# EAGLE board Desain Hardware Fahmi Mashuri (EAGLE 9.6.2)
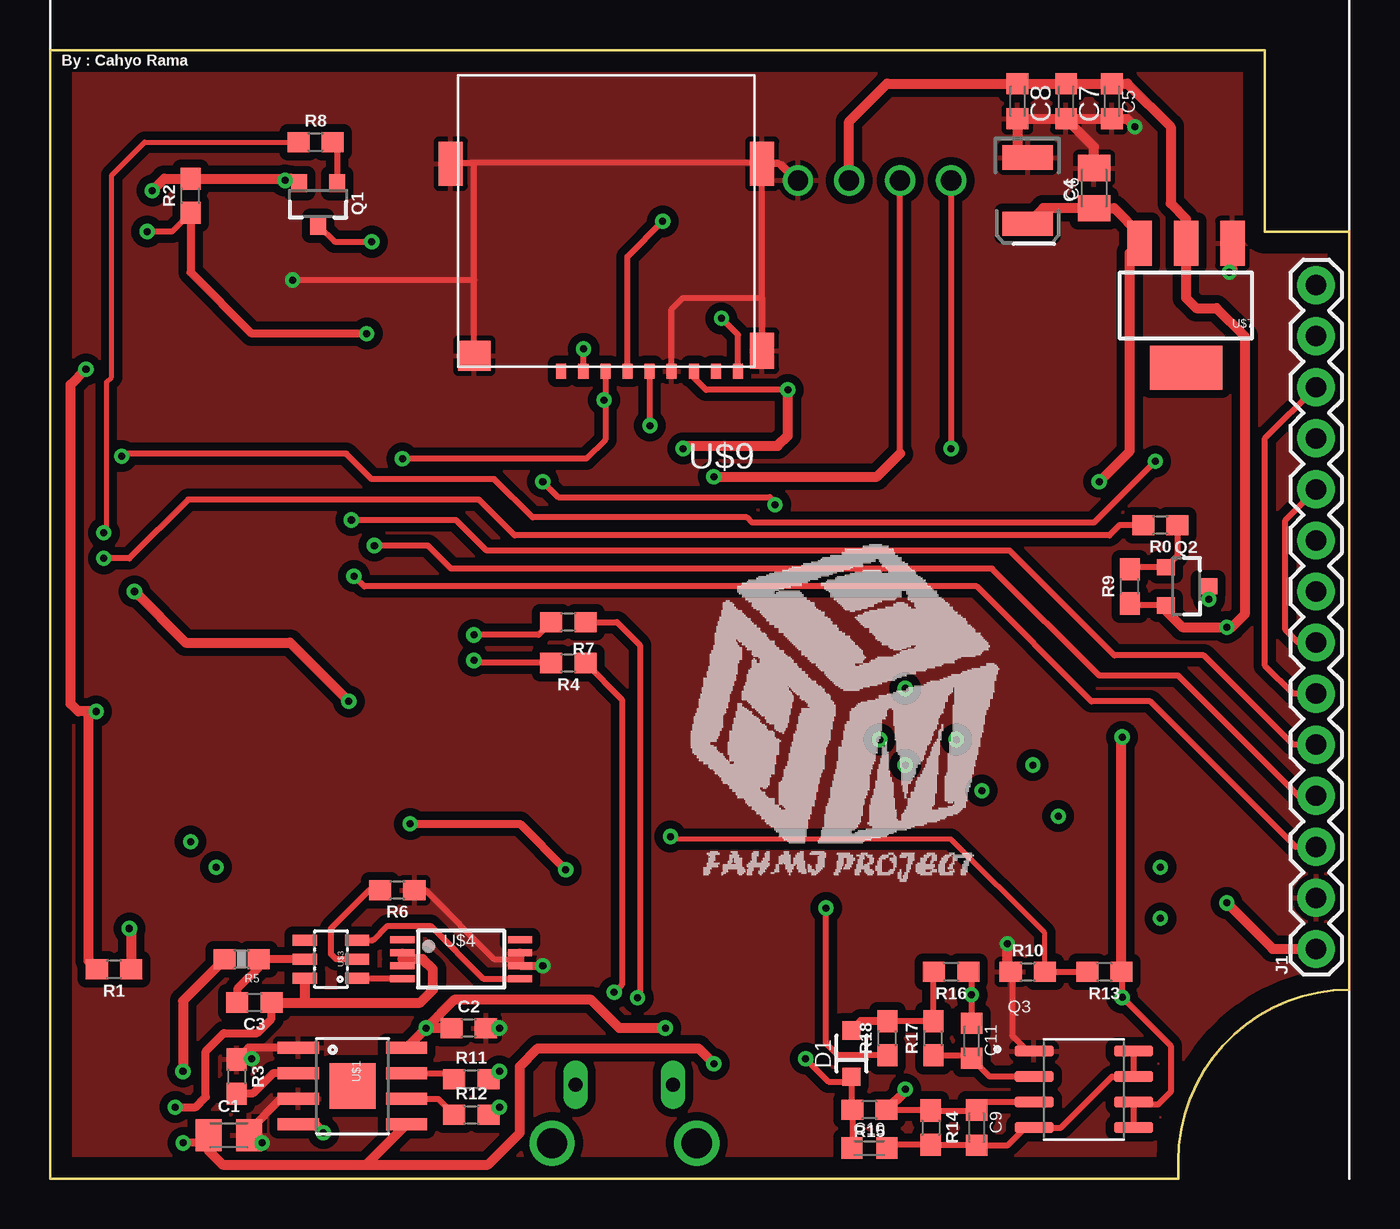
[diagram p0: board, top side]
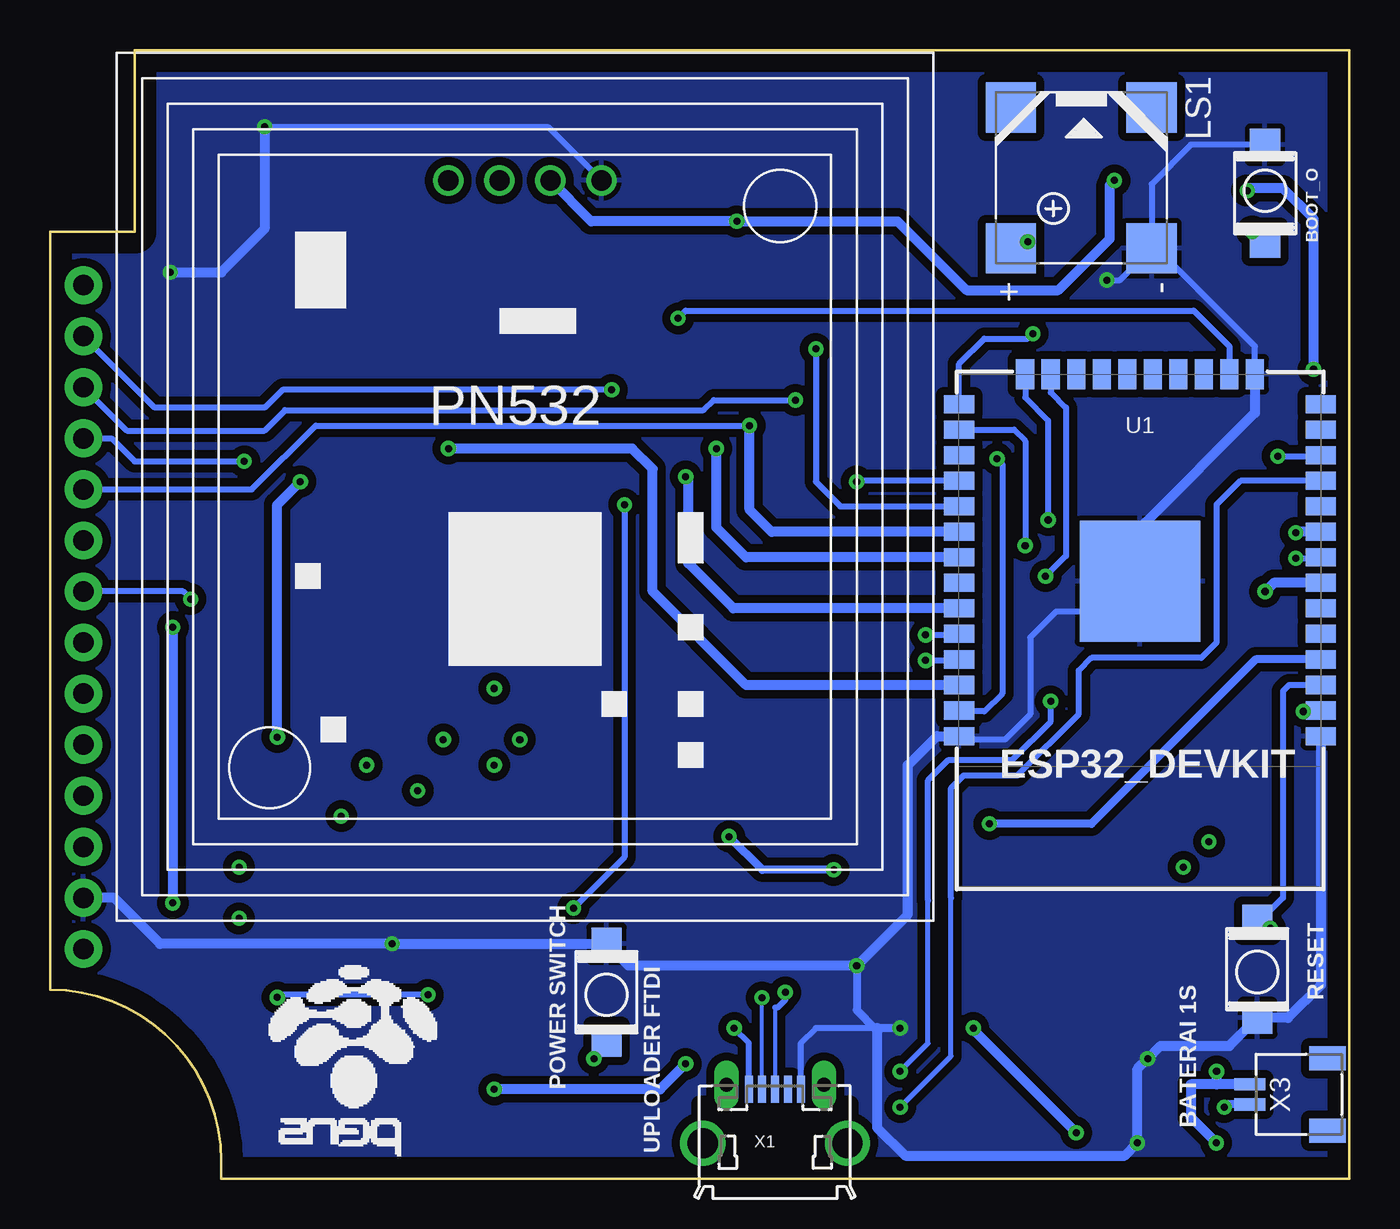
[diagram p1: board, bottom side, seen from below]

Size 64.64 x 56.13 mm. Coordinates in mm from the lower left corner, seen from the top.
Outline: 0,0 56.13,0 56.13,0.89 arc-90 64.64,9.4 64.64,47.12 60.45,47.12 60.45,56.13 0,56.13 0,0
Copper layers (1*16): Top 0.035mm / dielectric 1.5mm / Bottom 0.035mm
Design rules "default": minimum track width 6mil, minimum drill 0.35mm, track to track 6mil, track to pad 6mil, pad to pad 6mil, via to via 6mil, smd to smd 6mil, copper to edge 40mil, drill to drill 6mil, minimum pad ring 10mil, minimum via ring 8mil, stop-mask expansion 4mil, vias tented up to drill 0mil, thermal gap 10mil

## Footprints (pad centres in the part's own frame; a part is rotated, then mirrored left to right if it is on the bottom)
C0805K = smd 1.3 x 1.6: 1 -1,0; 2 1,0
0603 = smd 1.1 x 1: 1 -0.85,0; 2 0.85,0
EIA3528 = smd 1.2 x 2.5: A 1.65,0; C -1.65,0
C0603K = smd 1.05 x 1.08: 1 -0.875,0; 2 0.875,0
SOD-323 = smd 0.9 x 0.9: A 1.15,0; C -1.15,0
1X14 = drill 1.016 pad 1.88: 1 0,0; 2 2.54,0; 3 5.08,0; 4 7.62,0; 5 10.16,0; 6 12.7,0; 7 15.24,0; 8 17.78,0; 9 20.32,0; 10 22.86,0; 11 25.4,0; 12 27.94,0; 13 30.48,0; 14 33.02,0
CUI_CMT-8530S-SMT = smd 2.5 x 2.5: 1 -3.5,3.5; 2 -3.5,-3.5; N 3.5,3.5; P 3.5,-3.5
SOT23-3 = smd 0.8 x 0.9: 1 -0.95,-1; 2 0.95,-1; 3 0,1.1
SOIC127P600X175-8N = smd 1.97 x 0.57: 1 -2.475,1.905; 2 -2.475,0.635; 3 -2.475,-0.635; 4 -2.475,-1.905; 5 2.475,-1.905; 6 2.475,-0.635; 7 2.475,0.635; 8 2.475,1.905
0603-RES = smd 1.1 x 1: 1 -0.85,0; 2 0.85,0
ESP-WROOM-32 = smd 0.9 x 1.5: 1 7.7,9; 2 6.43,9; 3 5.16,9; 4 3.89,9; 5 2.62,9; 6 1.35,9; 7 0.08,9; 8 -1.19,9; 9 -2.46,9; 10 -3.73,9; 11 -5,9; 12 -6.27,9; 13 -7.54,9; 14 -8.81,9; 25 -8.81,-9; 26 -7.54,-9; 27 -6.27,-9; 28 -5,-9; 29 -3.73,-9; 30 -2.46,-9; 31 -1.19,-9; 32 0.08,-9; 33 1.35,-9; 34 2.62,-9; 35 3.89,-9; 36 5.16,-9; 37 6.43,-9; 38 7.7,-9 | smd 1.5 x 0.9: 15 -10.3,5.715; 16 -10.3,4.445; 17 -10.3,3.175; 18 -10.3,1.905; 19 -10.3,0.635; 20 -10.3,-0.635; 21 -10.3,-1.905; 22 -10.3,-3.175; 23 -10.3,-4.445; 24 -10.3,-5.715 | smd 6 x 6: GND 0,0
SOIC-8 = smd 0.61 x 2.057: 1 -2.07,-2.892; 2 -0.8,-2.892; 3 0.47,-2.892; 4 1.74,-2.892; 5 1.74,2.492; 6 0.47,2.492; 7 -0.8,2.492; 8 -2.07,2.492 | smd 2.286 x 2.286: EPAD -0.165,-0.2
PN532_NFC = drill 1: GND 16.51,6.35; SCL 24.13,6.35; SDA 21.59,6.35; VCC 19.05,6.35
SOT23-6L = smd 0.55 x 1.2: 1 -0.95,-1.3; 2 0,-1.3; 3 0.95,-1.3; 4 0.95,1.3; 5 0,1.3; 6 -0.95,1.3
TSSOP8 = smd 1.2 x 0.35: 1 -2.925,0.975; 2 -2.925,0.325; 3 -2.925,-0.325; 4 -2.925,-0.975; 5 2.925,-0.975; 6 2.925,-0.325; 7 2.925,0.325; 8 2.925,0.975
PUSHBUTTOMICRO = smd 1.6 x 1.5: 1 -0.381,1.524; 2 4.445,1.524
SOT223 = smd 1.219 x 2.235: 1 -2.311,-3.099; 2 0,-3.099; 3 2.311,-3.099 | smd 3.6 x 2.2: 4 0,3.099
MICROSD-PUSH-OUT = smd 0.5 x 0.75: 1 9.625,0.225; 2 8.525,0.225; 3 7.425,0.225; 4 6.325,0.225; 5 5.225,0.225; 6 4.125,0.225; 7 3.025,0.225; 8 1.925,0.225; CD 0.825,0.225 | smd 1.2 x 1.8: G1 -0.375,-0.8 | smd 1.2 x 2.2: G2 -0.375,-10.1; G4 15.125,-10.1 | smd 1.6 x 1.5: G3 13.95,-0.55
ZX62D-B-5PA8 = smd 1.35 x 0.4: 1 4.825,1.3; 2 4.825,0.65; 3 4.825,0; 4 4.825,-0.65; 5 4.825,-1.3 | drill 1.5: S1 2.15,-3.6; S2 2.15,3.6 | drill 0.7 long: S3 5.05,2.425; S4 5.05,-2.425
SM02B-SRSS-TB = smd 0.6 x 1.55: 1 0.5,0; 2 -0.5,0 | smd 1.2 x 1.8: M1 1.8,3.875; M2 -1.8,3.875

## Placement (x,y rotation side)
C1  10uF  [C0805K]  8.89,2.16 0 top
C2  1.0uF  [0603]  20.83,7.49 0 top
C3  0.1uF  [0603]  10.16,8.76 180 top
C4  2.2uF  [EIA3528]  48.64,49.15 270 top
C5  100nf  [C0603K]  52.83,53.59 270 top
C6  1uf  [C0805K]  51.94,49.28 90 top
C7  100nf  [C0603K]  50.55,53.59 270 top
C8  100nf  [C0603K]  48.13,53.59 270 top
C9  100nf  [C0603K]  46.1,2.54 270 top
C10  1uF  [C0603K]  40.77,1.52 0 top
C11  10uF  [C0603K]  45.85,6.86 270 top
D1  [SOD-323]  39.88,6.22 90 top
FRAME1  FRAME-LETTER  [CREATIVE_COMMONS]  5.71,-8.64 0 top  (outside the outline)
J1  [1X14]  62.99,11.43 90 top
LS1  CMT-8530S-SMT  [CUI_CMT-8530S-SMT]  13.33,49.78 270 bottom
Q1  2TY  [SOT23-3]  13.33,48.51 180 top
Q2  2TY  [SOT23-3]  56.52,29.46 270 top
Q3  IRF7319  [SOIC127P600X175-8N]  51.43,4.44 0 top
R0  1k  [0603]  55.24,32.51 180 top
R1  10k  [0603]  3.18,10.41 180 top
R2  10k  [0603]  6.99,48.89 90 top
R3  1.2k  [0603]  9.27,5.08 270 top
R4  100  [0603]  25.78,25.65 180 top
R5  100  [0603-RES]  9.52,10.92 180 top
R6  1k  [0603]  17.27,14.35 180 top
R7  100  [0603]  25.78,27.69 180 top
R8  100  [0603]  13.21,51.56 0 top
R9  10K  [0603]  53.72,29.46 90 top
R10  1.2k  [0603]  48.64,10.29 0 top
R11  100  [0603]  20.96,4.95 0 top
R12  100  [0603]  20.96,3.17 0 top
R13  330  [0603]  52.45,10.29 180 top
R14  100k  [0603]  43.81,2.54 270 top
R15  10K  [0603]  40.77,3.43 180 top
R16  100k  [0603]  44.83,10.29 180 top
R17  300k  [0603]  43.94,6.98 90 top
R18  1k  [0603]  41.66,6.98 90 top
U1  ESP-WROOM-32  [ESP-WROOM-32]  10.41,29.72 270 bottom
U$1  DIO5158  [SOIC-8]  15.24,4.44 270 top
U$2  PN532_NFC  [PN532_NFC]  20.7,56.01 180 bottom
U$3  DW01-P  [SOT23-6L]  13.97,10.92 90 top
U$4  FS8205A  [TSSOP8]  20.45,10.92 0 top
U$5  PUSHBUTTOMICRO  [PUSHBUTTOMICRO]  3.05,8.38 90 bottom
U$6  PUSHBUTTOMICRO  [PUSHBUTTOMICRO]  5.71,51.05 270 bottom
U$7  AMS1117  [SOT223]  56.52,43.43 180 top
U$8  PUSHBUTTOMICRO  [PUSHBUTTOMICRO]  35.43,7.24 90 bottom
U$9  MICROSD-PUSH-OUT  [MICROSD-PUSH-OUT]  35.05,40.39 180 top
X1  ZX62D-B-5PA8  [ZX62D-B-5PA8]  28.57,-0.38 90 bottom
X3  SM02B-SRSS-TB  [SM02B-SRSS-TB]  4.95,4.19 270 bottom

## Library data of the parts
C1 C5-C11 = rcl; SPICEPREFIX: C
C2 = SparkFun-Capacitors; PROD_ID: CAP-00868
C3 = SparkFun-Capacitors; PROD_ID: CAP-08604
C4 = SparkFun-Capacitors; PROD_ID: CAP-10790
D1 = bt_diode
FRAME1 = SparkFun-Aesthetics
J1 = SparkFun-Connectors
LS1 = Buzzer_SMD; AVAILABILITY: Good; CUI_PURCHASE_URL: https://www.cuidevices.com/product/audio/buzzers/audio-transducers/cmt-8530s-smt-tr?utm_source=snapeda.com&utm_medium=referral&utm_campaign=snapedaBOM; DESCRIPTION: 8.5 mm, 3.6 Vo-p, 90 dB, Surface Mount (SMT), Magnetic Audio Transducer Buzzer; MF: CUI Devices; MP: CMT-8530S-SMT-TR; PACKAGE: CUI; PRICE: None; PURCHASE-URL: https://pricing.snapeda.com/search/part/CMT-8530S-SMT-TR/?ref=eda
Q1 Q2 = SparkFun-DiscreteSemi; PROD_ID: TRANS-08052
Q3 = IRF7319; AVAILABILITY: Unavailable; DESCRIPTION: Mosfet Array N and P-Channel 30V 2W Surface Mount 8-SO; MF: Infineon Technologies; MP: IRF7319; PACKAGE: SOIC-8 International Rectifier; PRICE: None
R0 R1 R2 R4 R7-R9 R11 R12 R14-R18 = SparkFun-Resistors; PROD_ID: RES-10055
R3 R10 R13 = SparkFun-Resistors; PROD_ID: RES-09568
R5 U$4 = SparkFun
R6 = SparkFun-Resistors; PROD_ID: RES-07856
U1 = SparkFun-RF; PROD_ID: IC-13849
U$1 = ERADIONICA
U$2 = PN532
U$3 = lipo
U$5 U$6 U$8 = PUSHBUTTOMICRO
U$7 = SparkFun-IC-Power; PROD_ID: VREG-13917
U$9 = microsd
X1 = zx62d-b-5pa8-oshpark_10; MF: Hirose; MPN: ZX62D-B-5PA8; OC_FARNELL: 2300438; OC_NEWARK: 69W0712
X3 = con-JST SH

## Nets
3.3V: C5.1 C7.1 C8.1 J1.1 Q1.2 Q2.2 R1.2 R2.2 R9.1 U1.2 U$2.VCC U$7.2 U$9.4
BAT: C1.1 C9.1 Q3.3 R5.2 R14.1 R15.1 U$1.5 X3.2
EN: R1.1 U1.3 U$5.2
GND: C1.2 C2.2 C4.C C5.2 C6.2 C7.2 C8.2 J1.2 LS1.N Q3.1 R3.1 R6.1 R10.1 U1.1 U1.15 U1.38 U1.GND U$1.1 U$1.3 U$2.GND U$4.6 U$4.7 U$5.1 U$6.1 U$7.1 U$8.2 U$9.6 U$9.G1 U$9.G2 U$9.G3 U$9.G4 X1.5
GND-ISO: C3.1 U$3.6 U$4.2 U$4.3 X3.1
IO0: R2.1 U1.25 U$6.2
IO_2: J1.5 U1.24
IO_4: J1.4 U1.26
IO_5: U1.29 U$9.2
IO_15: J1.3 U1.23
IO_16: U1.16 U$9.CD
IO_17: R18.1 U1.28
IO_18: J1.7 J1.10 U1.30 U$9.5
IO_19: J1.13 U1.31 U$9.7
IO_21: U1.33 U$2.SDA
IO_22: U1.36 U$2.SCL
IO_23: J1.6 J1.12 U1.37 U$9.3
IO_26: R12.2 U1.11
IO_27: J1.11 U1.12
IO_32: R0.2 U1.8
IO_33: R8.1 U1.9
IO_35: R11.2 U1.7
IO_36: R10.2 R13.2 U1.4
LED_D: J1.8 Q2.3
N$1: R6.2 U$3.2
N$2: U$3.3 U$4.5
N$3: R3.2 U$1.2
N$4: U$3.1 U$4.4
N$5: R4.1 X1.3
N$6: R7.1 X1.2
N$7: LS1.P Q1.3
N$8: Q1.1 R8.2
N$9: Q2.1 R0.1 R9.2
N$10: R11.1 U$1.7
N$11: R12.1 U$1.6
N$12: D1.A R16.2 R17.2 R18.2
N$13: C11.2 Q3.2 R17.1
N$14: C9.2 C10.2 Q3.4 Q3.7 Q3.8 R14.2
N$15: C10.1 D1.C R15.2 U$8.1
RXD: R4.2 U1.35
TXD: R7.2 U1.34
VCC: C2.1 U$1.4 U$1.8 X1.1
VCC-DW: C3.2 R5.1 U$3.5
VIN: C4.A C6.1 C11.1 Q3.5 Q3.6 R13.1 R16.1 U$7.3

## Tracks (layer width: path | path; a pad name or v marks a point on that pad's centre or on a via)
3.3V  (via drill 0.35)
  Top 0.305: Q2.2 55.24,28.51 53.82,28.51 R9.1 | U$9.4 28.73,45.87 v30.48,47.62 | v11.68,49.66 12.06,49.66 | 12.06,49.66 12.24,49.66 Q1.2 | 11.98,49.74 12.06,49.66
  Top 0.508: U$2.VCC 39.75,52.58 41.64,54.47 C8.1 C7.1 C5.1 53.61,54.47 55.75,52.32 55.75,48.51 56.52,47.75 U$7.2 56.52,43.81 57.02,43.31 58.04,43.31 59.44,41.91 59.44,28.07 58.8,27.43 v58.55,27.43 56.33,27.43 55.24,28.51 | 11.98,49.74 R2.2 5.68,49.74 v5.08,49.15 | v58.55,13.72 60.83,11.43 J1.1 | v1.78,40.26 1.02,39.5 1.02,23.62 1.4,23.24 v2.29,23.24 2.03,23.24 1.91,23.11 1.91,10.83 R1.2
  Bottom 0.305: 11.94,49.4 v11.68,49.66
  Bottom 0.508: U$2.VCC 37.72,47.62 v30.48,47.62 22.48,47.62 19.05,44.2 14.48,44.2 11.94,46.74 11.94,49.4 | v58.55,27.43 v58.55,13.72 | U1.2 2.24,23.29 v2.29,23.24 | v1.78,40.26 1.78,47.75 3.3,49.28 4.95,49.28 v5.08,49.15
BAT  (via drill 0.35)
  Top 0.305: Q3.3 46.5,3.81 C9.1 46.08,3.39 R14.1 43.78,3.43 R15.1
  Top 0.406: C1.1 7.51,1.78 v6.62,1.78
  Top 0.508: C1.1 7.89,1.38 8.57,0.7 15.73,0.7 | U$1.5 15.73,0.7 | 15.73,0.7 21.78,0.7 23.37,2.29 23.37,5.59 24.26,6.48 32.26,6.48 v33.02,5.71 | v42.54,4.44 42.54,4.36 R15.1 | R5.2 6.6,8.85 v6.6,5.33
  Bottom 0.508: X3.2 6.6,4.69 | 6.6,4.69 7.89,4.69 7.89,3.05 v6.62,1.78 | v33.02,5.71 34.29,4.44 v42.54,4.44 | v6.6,5.33 6.6,4.69
EN  (via drill 0.35)
  Top 0.508: v3.94,12.45 4.03,12.36 R1.1
  Bottom 0.305: v3.94,12.45 4.32,12.83 4.45,12.83 | 4.45,12.83 U$5.2 | U1.3 3,24.56 3.3,24.26 3.3,13.97 4.45,12.83
GND  (via drill 0.35)
  Top 0.305: C2.2 v22.35,7.49 | R10.1 47.88,10.2 47.88,7.11 48.64,6.35 Q3.1 | R6.1 18.67,14.35 22.1,10.92 23.37,10.92 | U$9.6 30.93,43.25 31.5,43.81 35.43,43.81 U$9.G1 U$9.G2 36.38,50.49 U$2.GND 37.08,49.66 36.2,50.55 20.96,50.55 | U$9.G3 21.1,44.7 | 21.1,44.7 21.1,50.4 20.96,50.55 | 20.96,50.55 19.99,50.55 U$9.G4 | 21.1,44.7 v12.06,44.7
  Top 0.406: U$1.1 9.86,6.51 9.42,6.08 R3.1 | U$1.3 11.47,3.98 9.89,2.4 C1.2 | U$4.7 23.37,10.92 U$4.6 v24.51,10.6
  Top 0.508: C7.2 C8.2 48.13,51.31 C4.C | C7.2 C5.2 53.58,52.72 v53.97,52.32 | C6.2 51.94,51.32 C7.2 | C1.2 10.16,2.16 v10.54,1.78 | v10.03,5.97 9.52,5.97 9.42,6.08 | v58.67,45.09 58.83,45.24 U$7.1 | R10.1 47.62,10.45 v47.62,11.68
  Bottom 0.305: 23.5,7.49 26.54,7.49 27.3,6.73 27.3,4.47 X1.5 | U$6.1 7.87,51.43 9.83,49.47 LS1.N | U$2.GND 39.88,52.32 v53.97,52.32 | U1.15 4.7,41.4 9.58,46.28 LS1.N | v12.06,44.7 11.41,44.7 LS1.N | U1.GND 10.73,29.4 11.94,28.19 14.6,28.19 15.88,26.92 15.88,23.11 17.14,21.84 19.24,21.84 U1.38
  Bottom 0.406: v22.35,7.49 23.5,7.49 23.62,7.49 24.51,8.38 v24.51,10.6
  Bottom 0.508: 23.5,7.49 23.5,2.54 22.1,1.14 11.18,1.14 v10.54,1.78 10.54,5.46 v10.03,5.97 9.4,6.6 5.97,6.6 U$5.1 3.05,8 1.41,9.63 U1.1 | v58.67,45.09 56.13,45.09 53.97,47.24 v53.97,52.32 | J1.2 61.47,13.97 59.18,11.68 v47.62,11.68 U$8.2 35.87,10.6 v24.51,10.6 21.97,13.14 21.97,20.57 20.53,22.02 U1.38 | U1.15 4.7,38.1 10.16,32.64 10.16,28.7 10.54,28.7 10.73,28.89 10.73,29.4
  pour Top (isolate 0.406): 0,0 56.13,0 56.13,0.89 arc-90 64.64,9.4 64.64,47.12 60.45,47.12 60.45,56.13 0,56.13
  pour Bottom (isolate 0.406): -0.01,0 56.15,0 56.15,0.92 arc-90 64.64,9.4 64.64,47.12 64.64,47.12 60.45,47.12 60.45,47.38 60.45,56.14 60.19,56.14 -0.01,56.14 -0.01,55.63
GND-ISO  (via drill 0.35)
  Top 0.406: v6.22,3.56 7.24,3.56 7.75,4.06 7.75,6.35 8.64,7.24 10.29,7.24 11.01,7.96 C3.1 | U$4.2 17.52,10.92 U$4.3
  Top 0.508: C3.1 12.7,8.76 | 12.7,8.76 18.42,8.76 19.05,9.4 19.05,10.41 18.54,10.92 17.52,10.92 | U$3.6 12.67,8.79 12.7,8.76
  Bottom 0.406: X3.1 6.09,3.69 v6.22,3.56
IO0  (via drill 0.35)
  Top 0.305: R2.1 6.06,47.12 v4.83,47.12
  Top 0.406: R2.1 6.99,45.09 10.03,42.04 v15.75,42.04
  Bottom 0.305: v4.83,47.12 4.32,46.61 U$6.2 | U1.25 19.41,40.53 18.16,41.78 16,41.78 v15.75,42.04
IO_2  (via drill 0.35)
  Top 0.305: J1.5 61.85,21.59 57.4,26.04 52.96,26.04 47.75,31.24 21.72,31.24 20.19,32.77 v14.99,32.77
  Bottom 0.305: U1.24 16.13,38.86 14.99,37.72 v14.99,32.77
IO_4  (via drill 0.35)
  Top 0.305: J1.4 62.36,19.05 62.23,18.92 56.13,25.02 52.2,25.02 46.86,30.35 19.94,30.35 18.8,31.5 v16.13,31.5
  Bottom 0.305: U1.26 16.68,37.26 16.13,36.7 v16.13,31.5
IO_5  (via drill 0.35)
  Top 0.305: U$9.2 26.53,41.26 v26.54,41.27
  Bottom 0.305: v26.54,41.27 26.54,34.67 25.32,33.45 U1.29
IO_15  (via drill 0.35)
  Top 0.305: v15.11,29.97 15.62,29.46 46.1,29.46 51.82,23.75 54.74,23.75 61.98,16.51 J1.3
  Bottom 0.305: U1.23 14.86,39.12 14.1,38.35 14.1,30.99 v15.11,29.97
IO_16  (via drill 0.35)
  Top 0.305: U$9.CD 34.23,41.97 v33.4,42.8
  Bottom 0.305: U1.16 5.97,41.4 7.75,43.18 33.02,43.18 v33.4,42.8
IO_17  (via drill 0.35)
  Top 0.305: R18.1 39.2,6.13 38.61,6.73 v38.61,13.46 38.61,13.59 | v24.51,34.67 25.27,33.91 35.81,33.91 36.07,33.66 v36.07,33.53
  Bottom 0.305: U1.28 24.46,34.72 v24.51,34.67 | v36.07,33.53 36.07,16 v38.61,13.46
IO_18  (via drill 0.35)
  Top 0.305: J1.7 62.1,26.67 61.47,27.3 61.47,32.77 J1.10 | v29.85,37.46 29.83,37.48 U$9.5
  Bottom 0.305: J1.10 54.61,34.29 51.43,37.46 v29.85,37.46
  Bottom 0.508: U1.30 28.75,32.18 29.85,33.27 v29.85,37.46
IO_19  (via drill 0.35)
  Top 0.305: v36.7,39.24 32.64,39.24 32.03,39.85 U$9.7
  Top 0.508: v31.5,36.32 31.62,36.45 36.2,36.45 36.7,36.96 v36.7,39.24
  Bottom 0.305: J1.13 59.44,38.35 53.97,38.35 53.09,39.24 v36.7,39.24
  Bottom 0.508: U1.31 30.02,30.91 31.5,32.38 v31.5,36.32
IO_21  (via drill 0.35)
  Top 0.305: 42.29,36.07 U$2.SDA
  Top 0.508: v33.02,34.92 41.15,34.92 42.29,36.07
  Bottom 0.508: U1.33 30.65,28.37 32.89,30.61 32.89,34.8 v33.02,34.92
IO_22  (via drill 0.35)
  Top 0.305: U$2.SCL v44.83,36.32
  Bottom 0.508: U1.36 30.02,24.56 34.67,29.21 34.67,35.31 35.69,36.32 v44.83,36.32
IO_23  (via drill 0.35)
  Top 0.305: J1.6 61.85,24.13 60.45,25.53 60.45,36.83 J1.12 | v27.56,38.73 27.63,38.8 U$9.3 27.63,36.77 26.67,35.81 v17.53,35.81
  Bottom 0.305: J1.12 60.83,37.21 53.97,37.21 52.96,38.23 32.13,38.23 31.62,38.73 v27.56,38.73 | v17.53,35.81 17.27,35.56 17.27,24.13 18.16,23.24 19.37,23.24 U1.37
IO_26  (via drill 0.35)
  Top 0.406: R12.2 22.19,3.56 v22.35,3.56
  Bottom 0.254: v22.35,3.56 19.81,6.1 19.81,13.97
  Bottom 0.305: 19.81,13.97 19.81,19.43 19.18,20.07 16.51,20.07 13.46,23.11 13.46,25.27 12.83,25.91 7.37,25.91 6.6,26.67 6.6,33.53 5.41,34.72 U1.11
IO_27  (via drill 0.35)
  Top 0.305: 54.99,35.56 v54.99,35.69 51.94,32.64 34.92,32.64 34.67,32.89 24,32.89 22.1,34.8 16,34.8 14.73,36.07 3.68,36.07 v3.56,35.94
  Bottom 0.305: J1.11 61.59,36.83 60.45,35.69 v54.99,35.69 | v3.56,35.94 1.59,35.94 1.54,35.99 U1.12
IO_32  (via drill 0.35)
  Top 0.305: R0.2 53.21,32.51 52.7,32 23.11,32 21.34,33.78 6.86,33.78 3.94,30.86 v2.67,30.86
  Bottom 0.305: v2.67,30.86 1.46,30.86 U1.8
IO_33  (via drill 0.35)
  Top 0.254: v2.67,32.13 2.79,32.26 2.79,39.62 3.05,39.88 3.05,49.91 4.7,51.56 R8.1
  Bottom 0.508: U1.9 2.62,32.18 v2.67,32.13
IO_35  (via drill 0.35)
  Top 0.406: R11.2 22.19,5.33 v22.35,5.33
  Top 0.508: v4.19,29.21 6.73,26.67 11.94,26.67 v14.86,23.75
  Bottom 0.254: v22.35,5.33 20.96,6.73 20.96,13.84
  Bottom 0.305: 20.96,13.84 20.96,19.81 19.94,20.83 16.76,20.83 14.86,22.73 v14.86,23.75
  Bottom 0.508: U1.7 3.76,29.64 v4.19,29.21
IO_36  (via drill 0.35)
  Top 0.254: R10.2 49.49,12.23 44.83,16.89 30.99,16.89 v30.86,17.02
  Top 0.305: R10.2 R13.2
  Top 0.406: v17.91,17.65 23.37,17.65 v25.65,15.37
  Bottom 0.406: U1.4 4.65,25.83 12.83,17.65 v17.91,17.65 | v25.65,15.37 29.21,15.37 v30.86,17.02
LED_D  (via drill 0.35)
  Top 0.305: Q2.3 57.66,29.42 v57.66,28.83
  Bottom 0.305: v57.66,28.83 58.04,29.21 J1.8
N$1
  Top 0.305: U$3.2 14.22,10.92 13.97,11.18 13.97,12.45 15.88,14.35 R6.2
N$2
  Top 0.305: U$3.3 16.06,11.87 16.76,12.57 18.92,12.57 21.55,9.95 U$4.5
N$3
  Top 0.406: U$1.2 11.09,5.24 10.07,4.23 R3.2
N$4
  Top 0.305: U$4.4 15.29,9.95 U$3.1
N$5  (via drill 0.35)
  Top 0.305: R4.1 28.45,23.84 28.45,9.65 v28.07,9.27
  Bottom 0.203: 28.57,8.51 X1.3
  Bottom 0.305: v28.07,9.27 28.07,8.89 28.45,8.51 28.57,8.51
N$6  (via drill 0.35)
  Top 0.305: R7.1 28.19,27.69 29.34,26.54 29.34,9.11 v29.23,9
  Bottom 0.203: X1.2 v29.23,9 29.21,9.02
N$7  (via drill 0.35)
  Top 0.305: Q1.3 14.14,46.61 v16,46.61
  Bottom 0.305: v16,46.61 16.51,46.61 LS1.P
N$8
  Top 0.305: R8.2 14.28,51.34 Q1.1
N$9
  Top 0.305: R9.2 53.82,30.41 Q2.1 56.09,30.99 R0.1
N$10
  Top 0.305: U$1.7 19.81,5.24 R11.1
N$11
  Top 0.305: U$1.6 19.3,3.98 R12.1
N$12
  Top 0.305: R18.2 R17.2 43.94,10.25 R16.2
  Top 0.406: R18.2 40.34,7.83 D1.A
N$13
  Top 0.305: Q3.2 46.75,5.08 C11.2 45.7,6.13 R17.1
N$14
  Top 0.305: C10.2 41.81,1.69 R14.2 43.84,1.67 C9.2 46.11,1.65 47.62,1.65 48.51,2.54 Q3.4 50.29,2.54 52.83,5.08 Q3.7 Q3.8
N$15  (via drill 0.35)
  Top 0.305: C10.1 39.92,1.55 R15.2 39.88,3.47 39.88,4.83 | D1.C 39.88,4.83 | v37.59,5.97 38.73,4.83 39.88,4.83
  Bottom 0.305: U$8.1 37.59,6.22 v37.59,5.97
N$16  (via drill 0.35)
  other vias: 55.24,12.95
N$17  (via drill 0.35)
  other vias: 55.24,15.49
N$18  (via drill 0.35)
  other vias: 50.16,18.03
N$19  (via drill 0.35)
  other vias: 46.35,19.3
N$20  (via drill 0.35)
  other vias: 45.09,21.84
N$21  (via drill 0.35)
  other vias: 48.89,20.57
N$22  (via drill 0.35)
  other vias: 41.27,21.84
N$23  (via drill 0.35)
  other vias: 42.54,20.57
N$24  (via drill 0.35)
  other vias: 42.54,24.38
N$25  (via drill 0.35)
  other vias: 8.25,15.49
N$26  (via drill 0.35)
  other vias: 6.99,16.76
RXD  (via drill 0.35)
  Top 0.305: R4.2 21.21,25.65 v21.08,25.78
  Bottom 0.305: v21.08,25.78 19.46,25.78 U1.35
TXD  (via drill 0.35)
  Top 0.305: R7.2 24.3,27.05 v21.08,27.05
  Bottom 0.305: v21.08,27.05 19.46,27.05 U1.34
VCC  (via drill 0.35)
  Top 0.508: v30.61,7.49 28.32,7.49 26.92,8.89 20.11,8.89 v18.71,7.49 | v18.71,7.49 U$1.8 | C2.1 v18.71,7.49 | U$1.4 13.17,2.71 v13.59,2.29
  Bottom 0.305: X1.1 29.88,6.76 v30.61,7.49
  Bottom 0.508: v13.59,2.29 18.71,7.41 v18.71,7.49
VCC-DW
  Top 0.406: U$3.5 R5.1 10.38,10.5 9.31,9.44 C3.2
VIN  (via drill 0.35)
  Top 0.305: C11.1 v45.85,9.14 45.85,10.12 R16.1 | Q3.6 53.91,3.68 | 53.91,3.68 Q3.5 | R13.1 53.34,10.25 v53.34,9.02 55.75,6.6 55.75,4.32 55.12,3.68 53.91,3.68
  Top 0.508: C4.A 49.42,48.28 C6.1 52.94,48.28 54.2,47.02 U$7.3 53.72,46.05 53.72,36.2 v52.2,34.67 | R13.1 53.3,21.93 v53.34,21.97
  Bottom 0.305: v45.85,9.14 53.21,9.14 v53.34,9.02
  Bottom 0.508: v53.34,21.97 53.34,33.53 v52.2,34.67

## Text on the board
tPlace: By : Cahyo Rama
bPlace: BOOT_O | ESP32_DEVKIT | RESET | POWER SWITCH | BATERAI 1S | UPLOADER FTDI